# EAGLE board Tayloe Detector (EAGLE 9.1.2)
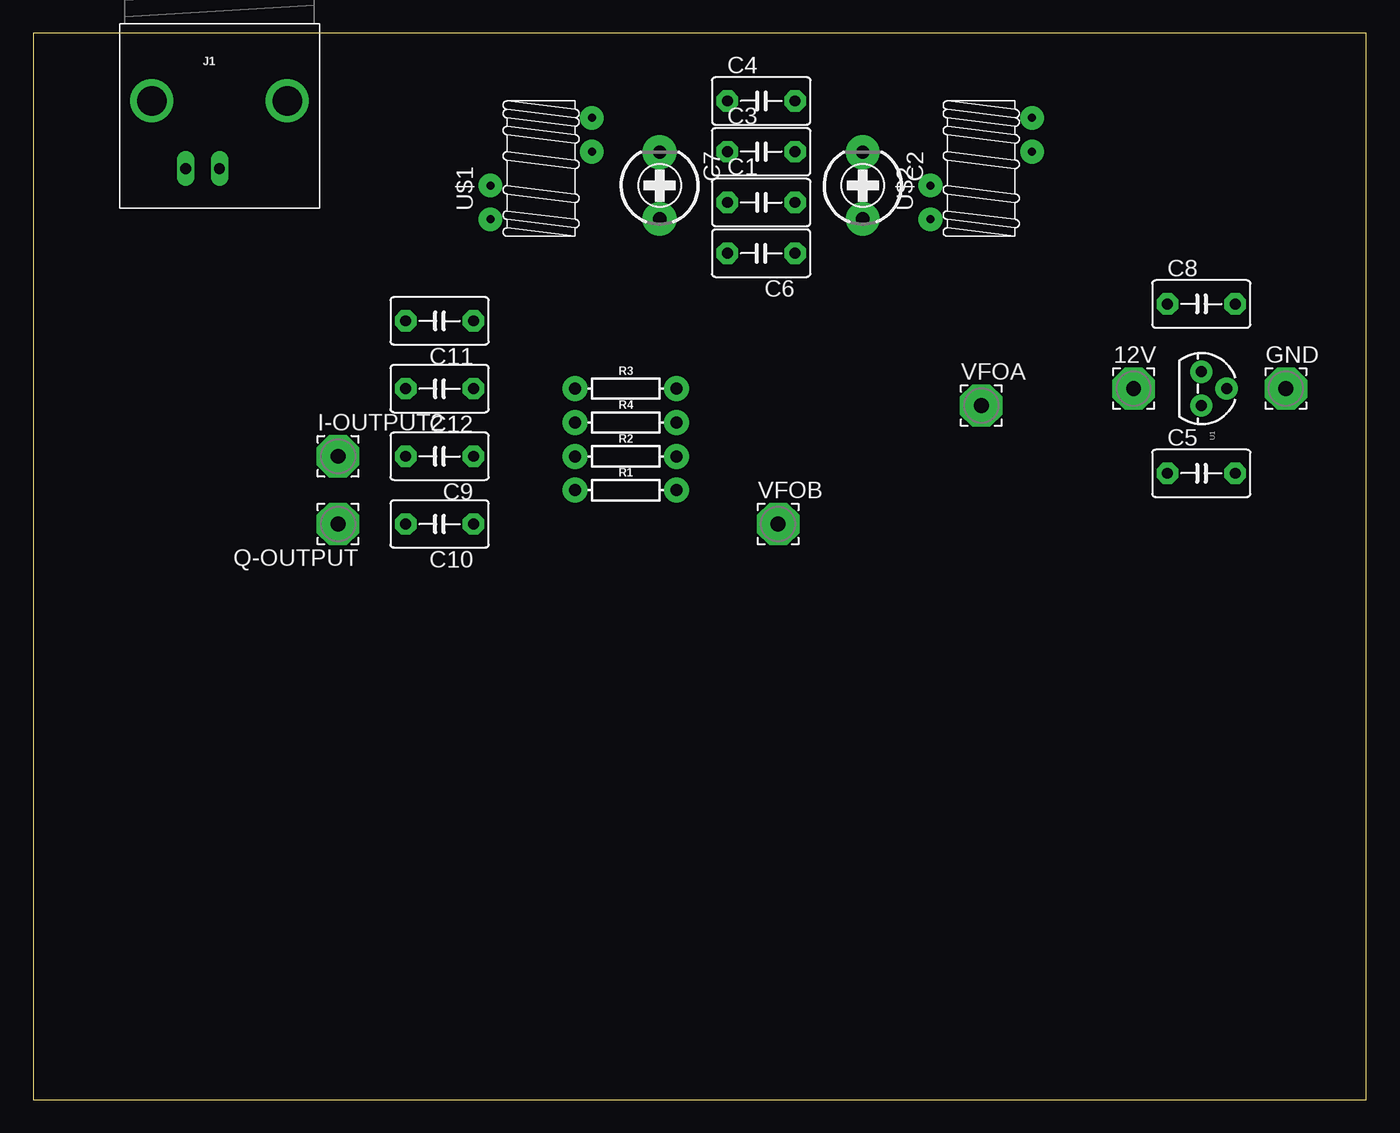
[diagram p0: board, top side]
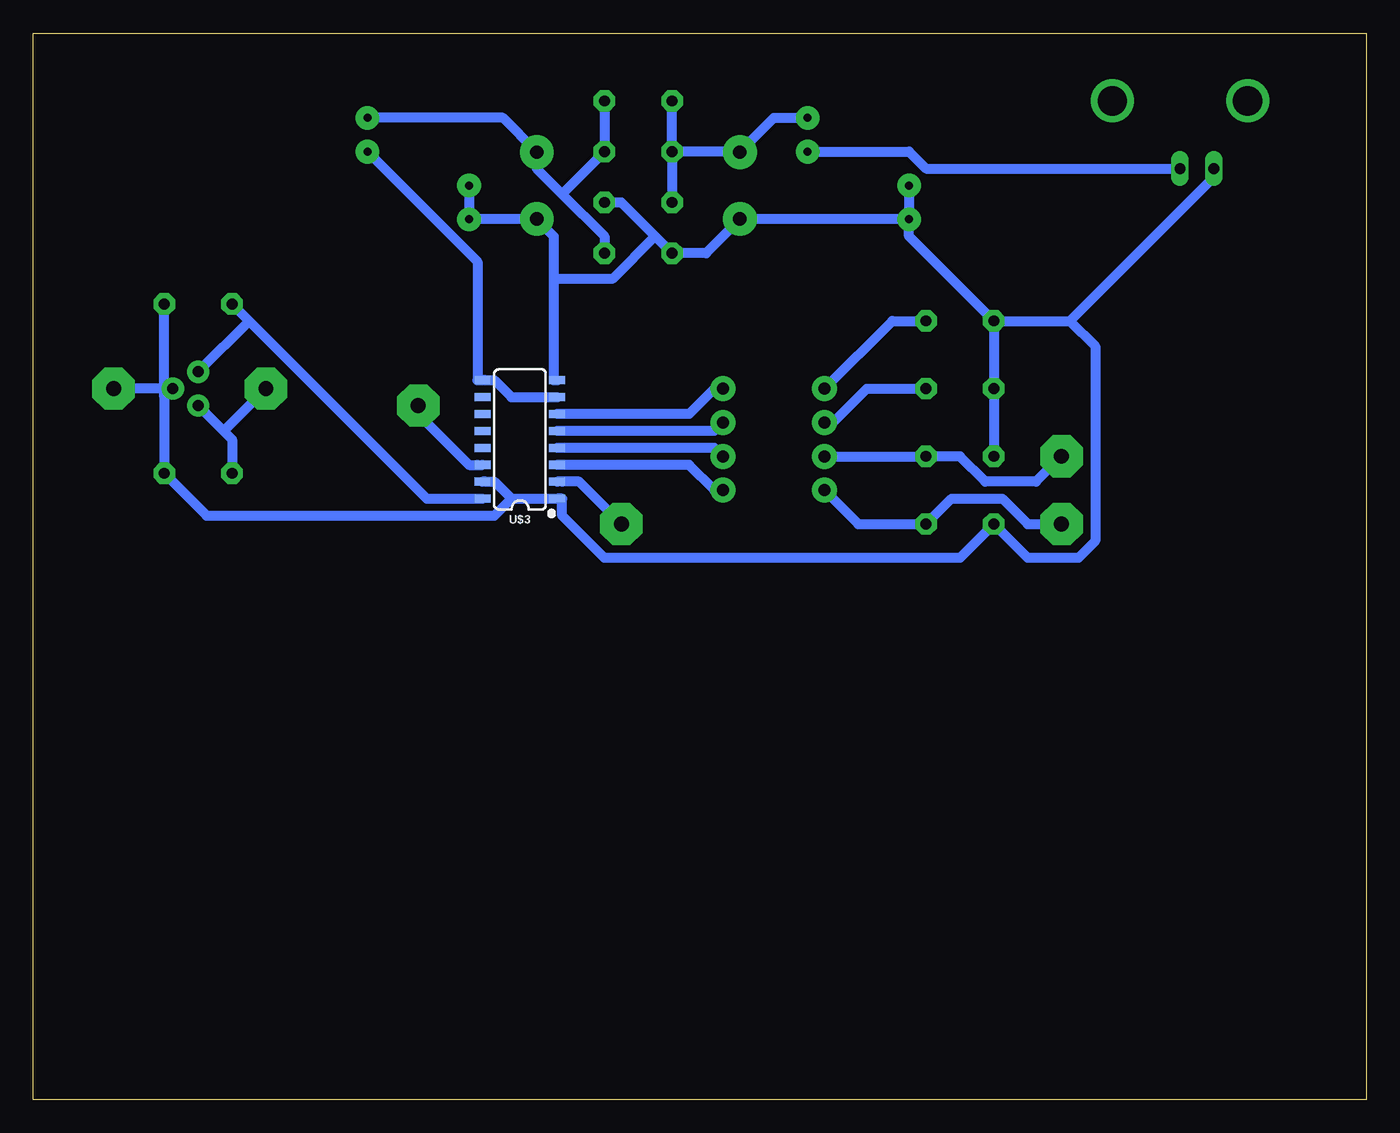
[diagram p1: board, bottom side, seen from below]

Size 100 x 80 mm. Coordinates in mm from the lower left corner, seen from the top.
Outline: 0,0 100,0 100,80 0,80 0,0
Copper layers (1*16): Top 0.035mm / dielectric 1.5mm / Bottom 0.035mm
Design rules "default": minimum track width 6mil, minimum drill 0.35mm, track to track 6mil, track to pad 6mil, pad to pad 6mil, via to via 6mil, smd to smd 6mil, copper to edge 40mil, drill to drill 6mil, minimum pad ring 10mil, minimum via ring 8mil, stop-mask expansion 4mil, vias tented up to drill 0mil, thermal gap 10mil
Net classes: 0 default: width 0.762 mm, drill 0.762 mm, clearance 0.508 mm

## Footprints (pad centres in the part's own frame; a part is rotated, then mirrored left to right if it is on the bottom)
3,17/1,1 = drill 1.118 pad 3.175 octagon: 1 0,0
C5B3.5 = drill 0.813 pad 1.6 octagon: 1 -2.54,0; 2 2.54,0
CTRIMTZ03 = drill 1 pad 2.54: 1 0,2.5; 2 0,-2.5
BNC = drill 2.2: 3 -5.08,5.08; 4 5.08,5.08 | drill 0.8 long: GND -2.54,0; S 0,0
AXIAL-0.3 = drill 0.9 pad 1.88: P$1 -3.81,0; P$2 3.81,0
TO-92 = drill 0.813 pad 1.676: 1 -1.27,0; 2 0,1.905; 3 1.27,0
T37_TRANSFORMER = drill 0.6 pad 1.778: C1A -3.81,-3.81; C1B 3.81,1.27; C2A -3.81,-1.27; C2B 3.81,3.81
SO16 = smd 0.6 x 1.2: 1 -4.445,-2.8; 2 -3.175,-2.8; 3 -1.905,-2.8; 4 -0.635,-2.8; 5 0.635,-2.8; 6 1.905,-2.8; 7 3.175,-2.8; 8 4.445,-2.8; 9 4.445,2.8; 10 3.175,2.8; 11 1.905,2.8; 12 0.635,2.8; 13 -0.635,2.8; 14 -1.905,2.8; 15 -3.175,2.8; 16 -4.445,2.8

## Placement (x,y rotation side)
12V  [3,17/1,1]  82.55,53.34 0 top
C1  150pF  [C5B3.5]  54.61,67.31 0 top
C2  [CTRIMTZ03]  62.23,68.58 180 top
C3  10pF  [C5B3.5]  54.61,71.12 0 top
C4  5pF  [C5B3.5]  54.61,74.93 0 top
C5  100uF  [C5B3.5]  87.63,46.99 0 top
C6  150pF  [C5B3.5]  54.61,63.5 180 top
C7  [CTRIMTZ03]  46.99,68.58 180 top
C8  22uf  [C5B3.5]  87.63,59.69 0 top
C9  470nF  [C5B3.5]  30.48,48.26 180 top
C10  470nF  [C5B3.5]  30.48,43.18 180 top
C11  470nF  [C5B3.5]  30.48,58.42 180 top
C12  470nF  [C5B3.5]  30.48,53.34 180 top
GND  [3,17/1,1]  93.98,53.34 0 top
I-OUTPUT2  [3,17/1,1]  22.86,48.26 0 top
J1  BNCPTH  [BNC]  13.97,69.85 0 top
Q-OUTPUT  [3,17/1,1]  22.86,43.18 180 top
R1  100  [AXIAL-0.3]  44.45,45.72 0 top
R2  100  [AXIAL-0.3]  44.45,48.26 0 top
R3  100  [AXIAL-0.3]  44.45,53.34 0 top
R4  100  [AXIAL-0.3]  44.45,50.8 0 top
U1  [TO-92]  87.63,53.34 270 top
U$1  T37_TRANSFORMER  [T37_TRANSFORMER]  38.1,69.85 0 top
U$2  T37_TRANSFORMER  [T37_TRANSFORMER]  71.12,69.85 0 top
U$3  FST3253  [SO16]  63.5,49.53 90 bottom
VFOA  [3,17/1,1]  71.12,52.07 0 top
VFOB  [3,17/1,1]  55.88,43.18 0 top

## Library data of the parts
12V GND I-OUTPUT2 Q-OUTPUT VFOA VFOB = wirepad
C1 C3-C6 C8-C12 = capacitor-wima
C2 C7 = resistor
J1 = SparkFun-Connectors; PROD_ID: LPA-12729; SF_ID: PRT-10550
R1-R4 = SparkFun-Resistors; PROD_ID: RES-12182
U1 = SparkFun-IC-Power
U$1 U$2 = toroid
U$3 = SparkFun-IC-Comms

## Nets
5V: C8.1 U1.1 U$3.16
GND: C1.2 C2.1 C5.2 C6.2 C7.1 C8.2 C9.2 C10.2 C11.2 C12.2 GND.1 J1.GND U1.2 U$1.C1A U$1.C2A U$2.C1A U$2.C2A U$3.1 U$3.8 U$3.15
N$1: C1.1 C3.1 C4.1 C7.2 U$1.C2B
N$2: J1.S U$1.C1B
N$3: C2.2 C3.2 C4.2 C6.1 U$2.C2B
N$4: U$2.C1B U$3.7 U$3.9
N$5: R1.P$2 U$3.3
N$6: C10.1 Q-OUTPUT.1 R1.P$1
N$9: C11.1 R3.P$1
N$10: C12.1 R4.P$1
N$11: R4.P$2 U$3.5
N$12: C9.1 I-OUTPUT2.1 R2.P$1
N$13: R2.P$2 U$3.4
N$14: R3.P$2 U$3.6
N$15: U$3.14 VFOA.1
N$17: U$3.2 VFOB.1
VCC: 12V.1 C5.1 U1.3

## Tracks (layer width: path | path; a pad name or v marks a point on that pad's centre or on a via)
5V
  Bottom 0.762: C8.1 83.82,58.42 | 83.82,58.42 70.48,45.09 66.67,45.09 U$3.16 | 83.82,58.42 U1.1
GND
  Bottom 0.762: 64.14,45.09 60.96,45.09 U$3.1 60.33,45.09 60.33,43.81 57.15,40.64 30.48,40.64 C10.2 25.4,40.64 21.59,40.64 20.32,41.91 20.32,56.52 22.23,58.42 | 64.14,45.09 65.41,46.35 66.04,46.35 U$3.15 | 90.17,52.7 C5.2 87,43.81 65.41,43.81 64.14,45.09 | 90.17,52.7 U1.2 90.17,53.34 | 90.17,52.7 90.17,53.34 | 90.17,53.34 C8.2 | 90.17,53.34 GND.1 | 46.99,66.04 49.53,63.5 C6.2 53.34,64.77 | 46.99,66.04 C7.1 46.99,66.04 | C1.2 55.88,67.31 53.34,64.77 | U$2.C2A U$2.C1A 62.23,66.04 | 60.96,61.59 60.96,64.77 62.23,66.04 | 60.96,61.59 60.96,53.98 U$3.8 | 62.23,66.04 C2.1 62.23,66.04 | 53.34,64.77 56.52,61.59 60.96,61.59 | C9.2 C12.2 C11.2 | U$1.C2A U$1.C1A | J1.GND 11.43,69.22 22.23,58.42 | C11.2 22.23,58.42 | U$1.C1A 34.29,64.77 C11.2 | U$1.C1A 46.99,66.04
N$1
  Bottom 0.762: C3.1 C1.1 | C3.1 C4.1 | U$1.C2B 44.45,73.66 46.99,71.12 | 46.99,71.12 C7.2 46.99,71.12 | 46.99,71.12 C3.1
N$2
  Bottom 0.762: J1.S 33.02,69.85 34.29,71.12 U$1.C1B
N$3
  Bottom 0.762: C4.2 C3.2 60.33,67.94 | C6.1 57.15,64.77 60.33,67.94 | 60.33,67.94 62.23,69.85 62.23,70.48 C2.2 62.23,71.12 64.77,73.66 U$2.C2B
N$4
  Bottom 0.762: U$3.7 60.96,52.7 64.14,52.7 65.41,53.98 66.04,53.98 U$3.9 66.67,53.98 66.67,62.87 U$2.C1B
N$5
  Bottom 0.762: R1.P$2 48.9,45.72 50.8,47.62 60.33,47.62 U$3.3
N$6
  Bottom 0.762: R1.P$1 38.1,43.18 C10.1 31.11,45.09 27.3,45.09 25.4,43.18 Q-OUTPUT.1
N$9
  Bottom 0.762: C11.1 35.56,58.42 R3.P$1
N$10
  Bottom 0.762: C12.1 37.47,53.34 40.01,50.8 R4.P$1
N$11
  Bottom 0.762: R4.P$2 48.9,50.16 60.33,50.16 U$3.5
N$12
  Bottom 0.762: R2.P$1 C9.1 30.48,48.26 28.57,46.35 24.77,46.35 I-OUTPUT2.1
N$13
  Bottom 0.762: R2.P$2 48.9,48.9 60.33,48.9 U$3.4
N$14
  Bottom 0.762: R3.P$2 48.9,53.34 50.8,51.44 60.33,51.44 U$3.6
N$15
  Bottom 0.762: VFOA.1 71.12,51.44 67.31,47.62 66.67,47.62 U$3.14
N$17
  Bottom 0.762: VFOB.1 59.05,46.35 60.33,46.35 U$3.2
VCC
  Bottom 0.762: C5.1 85.09,49.53 85.72,50.16 | U1.3 85.72,50.16 | 12V.1 85.72,50.16